# Altium PCB DSPpanel_v2.PcbDoc (part 1 of 2)
Units mil, origin at the board's own origin, x right, y up, seen from the top; angles counter-clockwise.
Board outline 3920 x 2100 mil, 2 copper layers (Top Layer, Bottom Layer); 189 components, 149 nets, 769 pads, 209 vias.
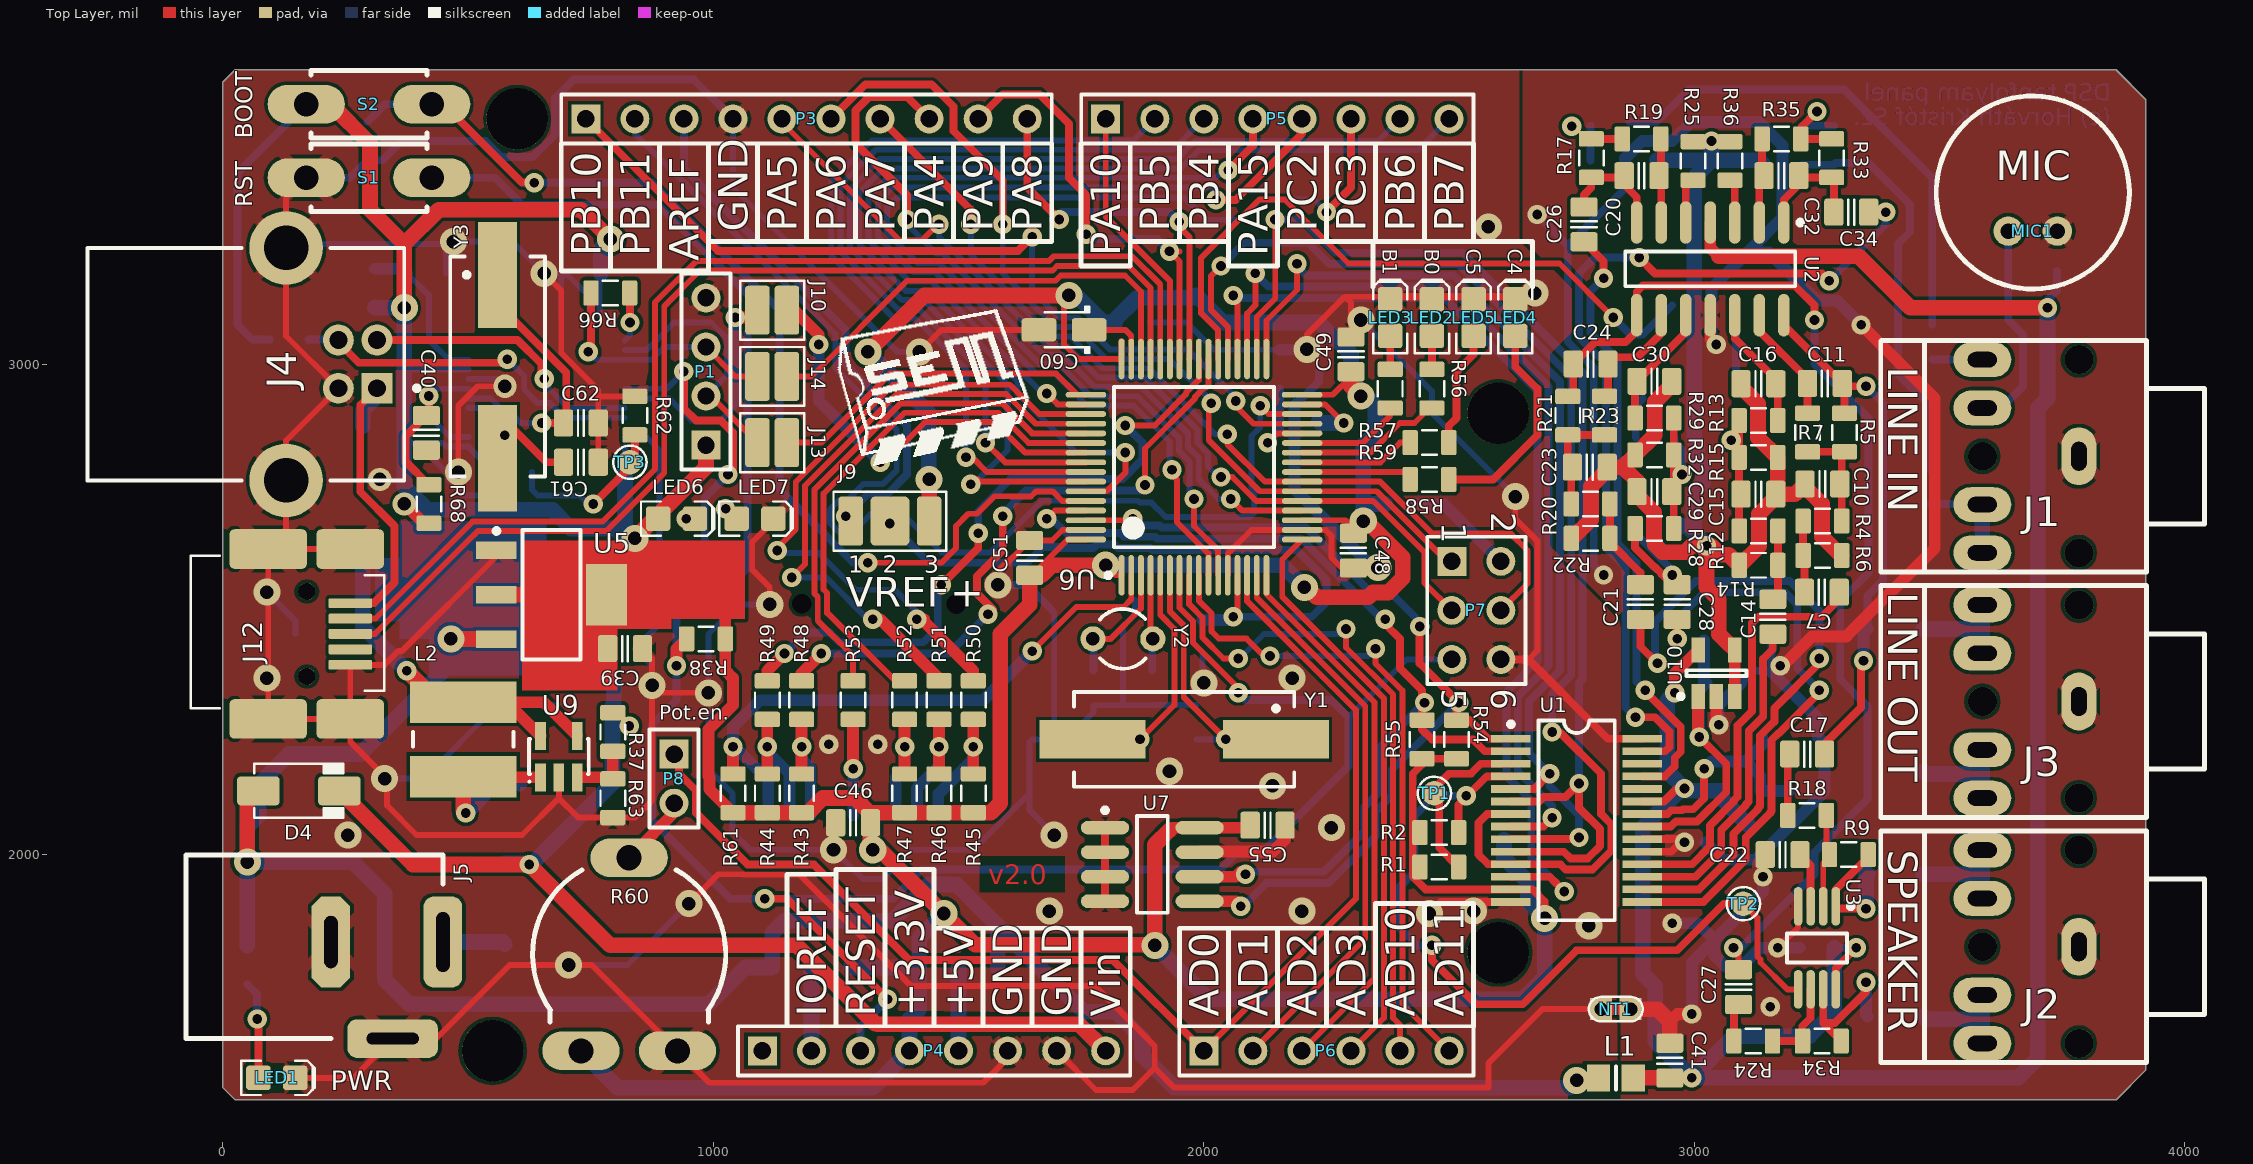
[diagram p0: Top Layer view]
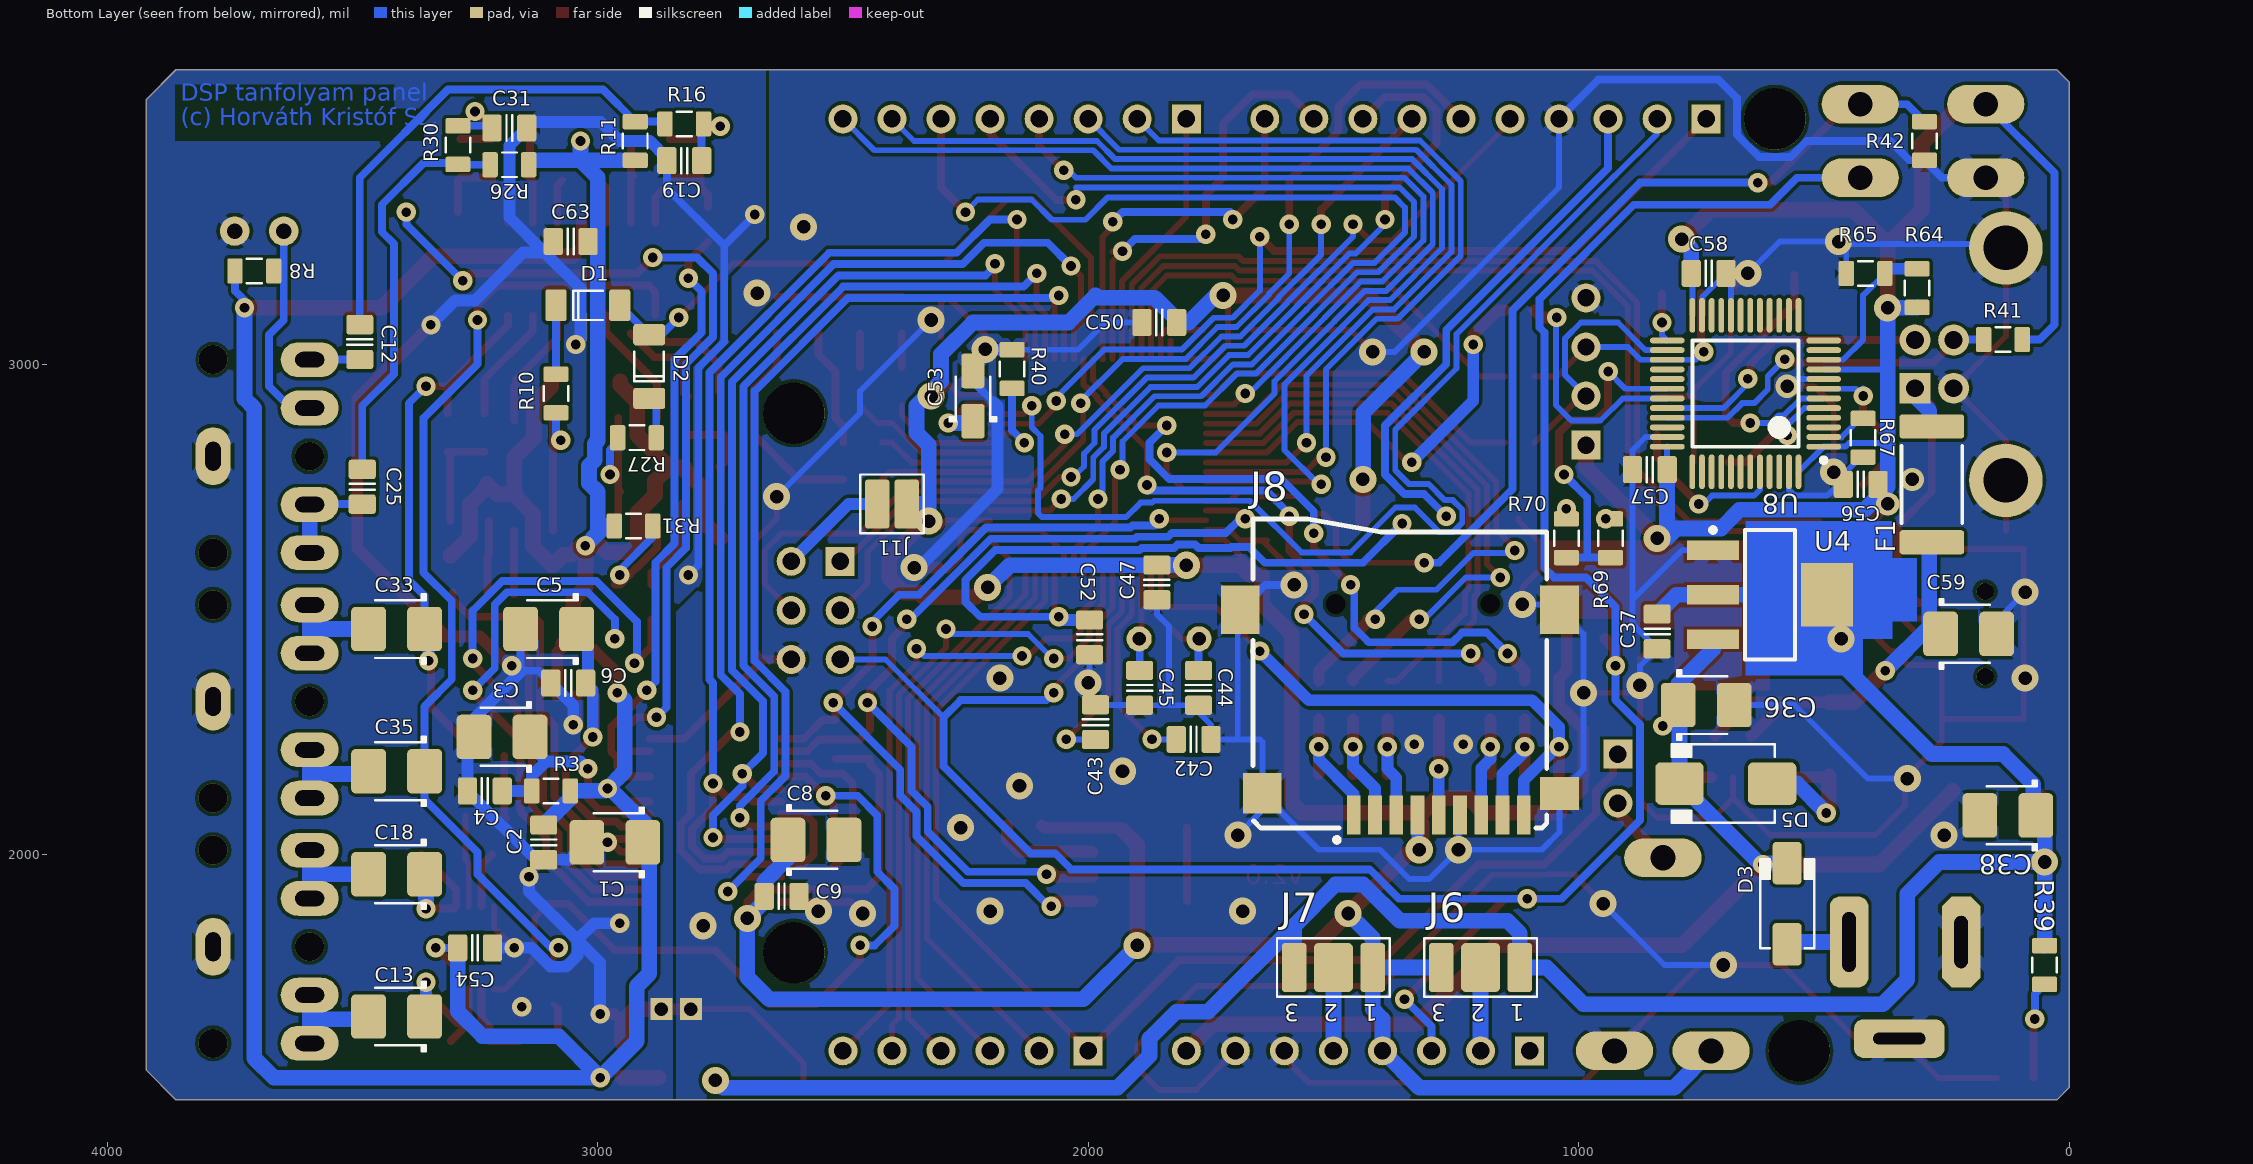
[diagram p1: Bottom Layer view, seen from below]
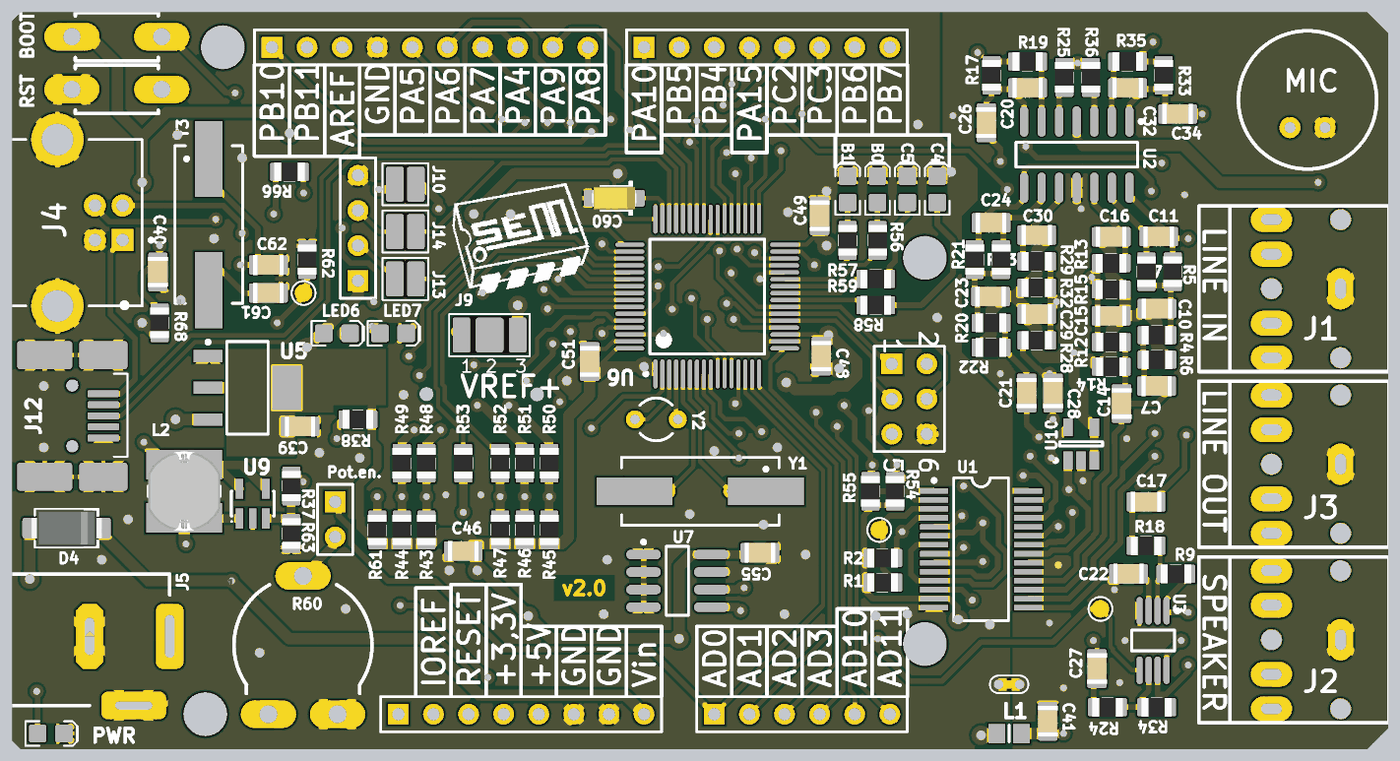
[diagram p3: 3D render of the assembled board from above, using the file's embedded part models]
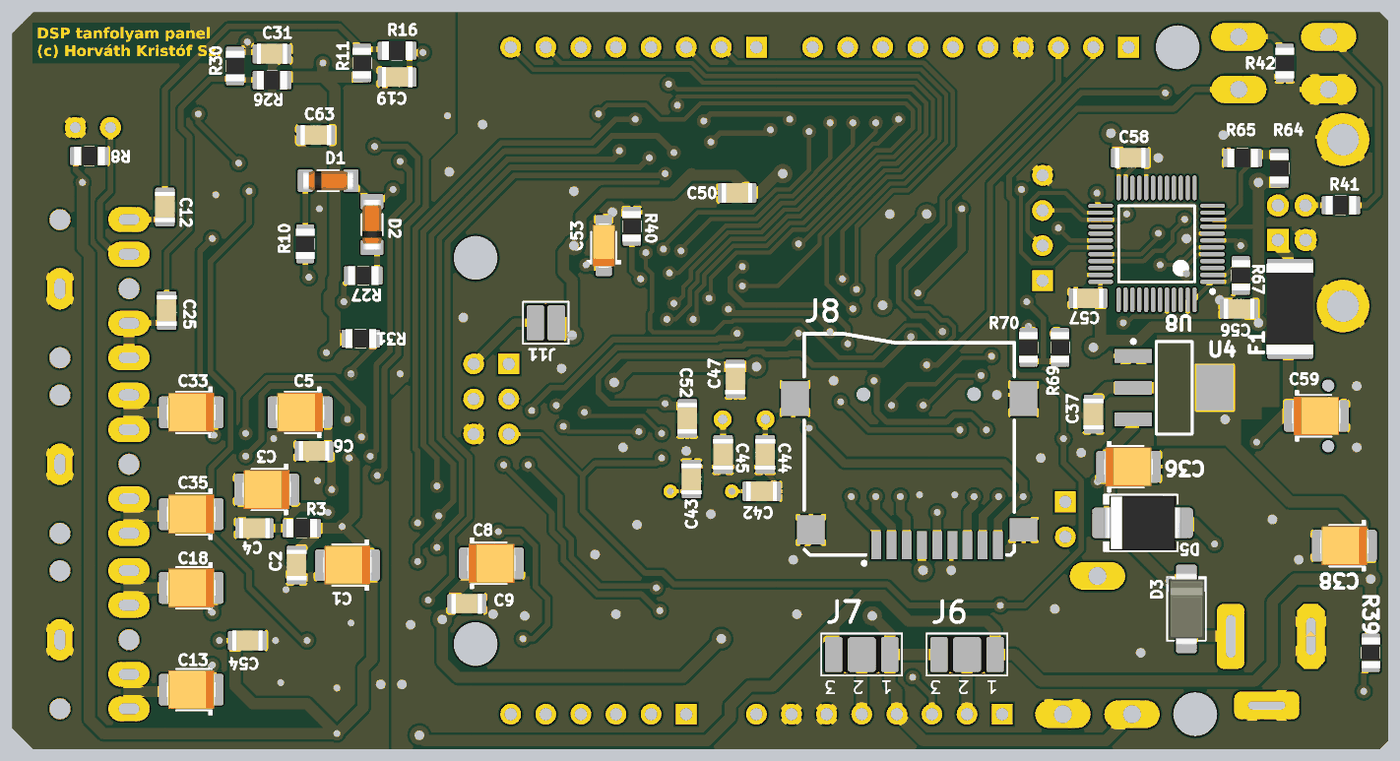
[diagram p4: 3D render of the assembled board from below, using the file's embedded part models]

## Layer stack, top to bottom
Top Layer: signal copper 1.4
Dielectric: core 12.6, FR-4, Dk 4.8
Bottom Layer: signal copper 1.4

## Board outline
25,1500 0,1525 0,3575 25,3600 3860,3600 3920,3540 3920,1560 3860,1500

## Design rules (kind name [scope] priority, off if disabled: settings)
Clearance [All] p1: gap=7
HoleSize [All] p1: absolutevalues=TRUE maxlimit=100 minlimit=27.56 maxpercent=80.000 minpercent=20.000
MinimumAnnularRing [All] p1: minimumring=7.87
MinimumSolderMaskSliver [All] p1 off: minsoldermaskwidth=10
PlaneClearance [All] p1: clearance=8
PolygonConnect "Net tie" [All vs HasFootprint('NetTie_External_24mil')] p1: connectstyle=Direct reliefconductorwidth=10 reliefentries=4 polygonreliefangle="90 Angle"
PolygonConnect Alkatreszek [(InComponentClass('All Components'))] p2: connectstyle=Relief reliefconductorwidth=20 reliefentries=4 polygonreliefangle="45 Angle"
PolygonConnect [All] p3: connectstyle=Direct reliefconductorwidth=10 reliefentries=4 polygonreliefangle="90 Angle"
RoutingVias [All] p1: holewidth=27.56 width=47.24 viastyle="Through Hole" minholewidth=19.68 minwidth=39.37 maxholewidth=39.37 maxwidth=59.06
SilkscreenOverComponentPads [All] p1: minsilkscreentomaskgap=10
SolderMaskExpansion [All] p1: expansion=4
Width [All] p1: maxlimit=32 minlimit=12 preferedwidth=16
24 further rules are at their usual default settings.

## Classes and differential pairs
component class stlink: C40 C56 C57 C58 C61 C62 LED6 LED7 P1 R41 R62 R64 R65 R66 R67 R68 R69 R70 TP3 U8 Y3
component class tapegyseg: C36 C37 C38 C39 C41 C59 D3 D4 D5 F1 J4 J5 L1 L2 LED1 NT1 R37 R38 R39 R63 U4 U5 U9
component class audioCodec: C1 C2 C3 C4 C5 C6 C7 C8 C9 C10 C11 C12 C13 C14 C15 C16 C17 C18 C19 C20 C21 C22 C23 C24 C25 C26 C27 C28 C29 C30 C31 C32 C33 C34 C35 C54 C63 D1 D2 J1 J2 J3 MIC1 R1 R2 R3 R4 R5 R6 R7 R8 R9 R10 R11 R12 R13 R14 R15 R16 R17 R18 R19 R20 R21 R22 R23 R24 R25 R26 R27 R28 R29 R30 R31 R32 R33 R34 R35 R36 TP1 TP2 U1 U2 U3 U10
component class DSPpanel_v2: C42 C43 C44 C45 C46 C47 C48 C49 C50 C51 C52 C53 C55 C60 J6 J7 J8 J9 J10 J11 J12 J13 J14 LED2 LED3 LED4 LED5 P3 P4 P5 P6 P7 P8 R40 R42 R43 R44 R45 R46 R47 R48 R49 R50 R51 R52 R53 R54 R55 R56 R57 R58 R59 R60 R61 S1 S2 U6 U7 Y1 Y2

## Components (designator, comment, footprint, x,y, rotation, side; value= is the part's Value field where it differs from the comment)
C1 "Cap Pol2" CAPMP3528X210N 2965,2025 r0 bottom
C2 "Cap" CAPC2012X135N 3110,2025 r270 bottom
C3 "Cap Pol2" CAPMP3528X210N 3195,2240 r0 bottom
C4 "Cap" CAPC2012X135N 3230,2130 r0 bottom
C5 "Cap Pol2" CAPMP3528X210N 3100,2460 r0 bottom
C6 "Cap" CAPC2012X135N 3060,2350 r0 bottom
C7 "Cap" CAPC2012X135N 3260,2535 r0 top
C8 "Cap Pol2" CAPMP3528X210N 2555,2030 r180 bottom
C9 "Cap" CAPC2012X135N 2625,1915 r180 bottom
C10 "Cap" CAPC2012X135N 3261.06,2755.63 r180 top
C11 "Cap" CAPC2012X135N 3266.06,2960.63 r0 top
C12 "Cap" CAPC2012X135N 3485,3045 r90 bottom
C13 "Cap Pol2" CAPMP3528X210N 3410,1670 r0 bottom
C14 "Cap" CAPC2012X135N 3160,2485 r270 top
C15 "Cap" CAPC2012X135N 3130.63,2735 r0 top
C16 "Cap" CAPC2012X135N 3130.63,2960 r180 top
C17 "Cap" CAPC2012X135N 3230,2205 r180 top
C18 "Cap Pol2" CAPMP3528X210N 3410,1960 r0 bottom
C19 "Cap" CAPC2012X135N 2823.46,3415 r0 bottom
C20 "Cap" CAPC2012X135N 2892.48,3384.21 r0 top
C21 "Cap" CAPC2012X135N 2890,2515 r270 top
C22 "Cap" CAPC2012X135N 3180,2000 r180 top
C23 "Cap" CAPC2012X135N 2786.97,2790 r0 top
C24 "Cap" CAPC2012X135N 2788.54,3000 r180 top
C25 "Cap" CAPC2012X135N 3480,2750 r90 bottom
C26 "Cap" CAPC2012X135N 2775,3285 r90 top
C27 "Cap" CAPC2012X135N 3090,1730 r90 top
C28 "Cap" CAPC2012X135N 2965,2515 r270 top
C29 "Cap" CAPC2012X135N 2918.54,2740 r180 top
C30 "Cap" CAPC2012X135N 2918.54,2965 r0 top
C31 "Cap" CAPC2012X135N 3180,3481.54 r180 bottom
C32 "Cap" CAPC2012X135N 3177.48,3384.21 r180 top
C33 "Cap Pol2" CAPMP3528X210N 3410,2460 r0 bottom
C34 "Cap" CAPC2012X135N 3320,3310 r180 top
C35 "Cap Pol2" CAPMP3528X210N 3410,2170 r0 bottom
C36 "Cap Pol2" CAPMP3528X210N 740,2305 r180 bottom
C37 "Cap" CAPC2012X135N 840,2455 r90 bottom
C38 "Cap Pol2" CAPMP3528X210N 125,2080 r0 bottom
C39 "Cap" CAPC2012X135N 820,2420 r180 top
C40 "Cap" CAPC2012X135N 415,2860 r90 top
C41 "Cap" CAPC2012X135N 2950,1580 r270 top
C42 "Cap" CAPC2012X135N 1785,2235 r180 bottom
C43 "Cap" CAPC2012X135N 1985,2270 r90 bottom
C44 "Cap" CAPC2012X135N 1775,2340 r90 bottom
C45 "Cap" CAPC2012X135N 1895,2340 r90 bottom
C46 "Cap" CAPC2012X135N 1285,2065 r0 top
C47 "Cap" CAPC2012X135N 1860,2555 r90 bottom
C48 "Cap" CAPC2012X135N 2305,2620 r90 top
C49 "Cap" CAPC2012X135N 2300,3020 r270 top
C50 "Cap" CAPC2012X135N 1855,3085 r180 bottom
C51 "Cap" CAPC2012X135N 1645,2605 r270 top
C52 "Cap" CAPC2012X135N 1997,2443 r90 bottom
C53 "4µ7" CAPMP3216X180N 2235,2935 r90 bottom
C54 "Cap" CAPC2012X135N 3250,1810 r180 bottom
C55 "Cap" CAPC2012X135N 2130,2060 r180 top
C56 "Cap" CAPC2012X135N 425,2755 r180 bottom
C57 "Cap" CAPC2012X135N 855,2785 r180 bottom
C58 "Cap" CAPC2012X135N 735,3185 r0 bottom
C59 "Cap Pol2" CAPMP3528X210N 205,2450 r180 bottom
C60 "4µ7" CAPMP3216X180N 1715,3070 r180 top
C61 "Cap" CAPC2012X135N 730,2800 r0 top
C62 "Cap" CAPC2012X135N 730,2880 r180 top
C63 "Cap" CAPC2012X135N 3055,3250 r0 bottom
D1 "Mini MELF" "SOD80, LL-34" 3020,3120 r180 bottom
D2 "Mini MELF" "SOD80, LL-34" 2895,2995 r90 bottom
D3 "100V; 1.5A" DO-214AC 575,1900 r90 bottom
D4 "100V; 1.5A" DO-214AC 155,2130 r0 top
D5 "SS34" DO-214AA 700,2145 r0 bottom
F1 "200 mA multifuse" RESC6332X70N 280,2755 r270 bottom
J1 "LINE IN" "STEREO JACK 3.5 mm" 4040,2950 r270 top locked
J2 "SPEAKER" "STEREO JACK 3.5 mm" 4040,1950 r270 top locked
J3 "LINE OUT" "STEREO JACK 3.5 mm" 4040,2450 r270 top locked
J4 "USB B female" 1437106 275,3000 r180 top locked
J5 "DC-JACK" JACK -75,1625 r90 top locked
J6 "IOREF" Jump_3Way#1 1200,1770 r0 bottom
J7 "Board 5/3.3V" Jump_3Way#1 1500,1770 r0 bottom
J8 "MicroSD Slot" "MICROSD Slot" 1205,2075 r270 bottom locked
J9 "VREF+" Jump_3Way#2 1360,2680 r0 top
J10 "Jumper" JUMP1#1 1120,3110 r0 top
J11 "Jumper" JUMP1#2 2400,2715 r0 bottom
J12 "USB Mini-B" USB_Mini-B_Molex_SMT -65,2255 r0 top locked
J13 "Jumper" JUMP1#1 1120,2840 r180 top
J14 "Jumper" JUMP1#1 1120,2975 r180 top
L1 "Inductor" 6-0805_N 2840,1545 r0 top
L2 "7447745100" WE-PD2-MS 490,2235 r270 top
LED1 "Red" LED-0805-K 110,1545 r0 top locked
LED2 "B0" LED-0805-K 2465,3095 r90 top
LED3 "B1" LED-0805-K 2380,3095 r90 top
LED4 "C4" LED-0805-K 2635,3095 r90 top
LED5 "C5" LED-0805-K 2550,3095 r90 top
LED6 "B0" LED-0805-K 925,2685 r0 top
LED7 "B0" LED-0805-K 1085,2685 r0 top
MIC1 "Electret microphone" "MIC 10 mm" 3690,3350 r270 top locked
NT1 "Net Tie" NetTie_External_24mil 2840,1685 r0 top net-tie
P1 "SWD" HDR1X4 985,2835 r90 top locked
P3 "DIGITAL0" HDR1X10 740,3500 r0 top locked
P4 "POWER" HDR1X8 1100,1600 r0 top locked
P5 "DIGITAL1" HDR1X8 1800,3500 r0 top locked
P6 "ANALOG" HDR1X6 2000,1600 r0 top locked
P7 "Header 3X2" HDR2X3 2505.51,2598.03 r270 top locked
P8 "Pot.en." HDR1X2 920,2205 r270 top
R1 "Opcionális" RESC2012X70N 2480,1975 r0 top
R2 "Res2" RESC2012X70N 2480,2045 r0 top
R3 "Res2" RESC2012X70N 3095,2130 r0 bottom
R4 "Res2" RESC2012X70N 3261.06,2680 r180 top
R5 "Res2" RESC2012X70N 3306.06,2860.63 r270 top
R6 "Res2" RESC2012X70N 3261.06,2610 r180 top
R7 "Res2" RESC2012X70N 3231.06,2860.63 r270 top
R8 "Res2" RESC2012X70N 3700,3190 r0 bottom
R9 "Res2" RESC2012X70N 3315,2000 r180 top
R10 "Res2" RESC2012X70N 3085,2940 r90 bottom
R11 "Res2" RESC2012X70N 2923.46,3455 r270 bottom
R12 "Res2" RESC2012X70N 3131.06,2660 r0 top
R13 "Res2" RESC2012X70N 3130.63,2885 r180 top
R14 "Res2" RESC2012X70N 3131.06,2590 r0 top
R15 "Res2" RESC2012X70N 3130.63,2810 r0 top
R16 "Res2" RESC2012X70N 2823.46,3490 r180 bottom
R17 "Res2" RESC2012X70N 2790,3420 r90 top
R18 "Res2" RESC2012X70N 3230,2080 r180 top
R19 "Res2" RESC2012X70N 2892.48,3459.21 r180 top
R20 "Res2" RESC2012X70N 2788.54,2715 r0 top
R21 "Res2" RESC2012X70N 2741.97,2895 r270 top
R22 "Res2" RESC2012X70N 2788.54,2645 r0 top
R23 "Res2" RESC2012X70N 2816.97,2895 r270 top
R24 "Res2" RESC2012X70N 3120,1620 r180 top
R25 "Res2" RESC2012X70N 2997.48,3414.21 r90 top
R26 "Res2" RESC2012X70N 3180,3406.54 r180 bottom
R27 "Res2" RESC2012X70N 2920,2850 r0 bottom
R28 "Res2" RESC2012X70N 2918.54,2665 r180 top
R29 "Res2" RESC2012X70N 2918.54,2890 r0 top
R30 "Res2" RESC2012X70N 3285,3446.54 r90 bottom
R31 "Res2" RESC2012X70N 2926.97,2670 r180 bottom
R32 "Res2" RESC2012X70N 2918.54,2815 r180 top
R33 "Res2" RESC2012X70N 3280,3420 r90 top
R34 "Res2" RESC2012X70N 3260,1620 r180 top
R35 "Res2" RESC2012X70N 3177.48,3459.21 r0 top
R36 "Res2" RESC2012X70N 3072.48,3414.21 r90 top
R37 "Res2" RESC2012X70N 795,2250 r90 top
R38 "Res2" RESC2012X70N 985,2440 r180 top
R39 "Res2" RESC2012X70N 50,1775 r90 bottom
R40 "Res2" RESC2012X70N 2155,2990 r270 bottom
R41 "Res2" RESC2012X70N 135,3050 r180 bottom
R42 "Res2" RESC2012X70N 295,3455 r90 bottom
R43 "Res2" RESC2012X70N 1180,2125 r270 top
R44 "Res2" RESC2012X70N 1110,2125 r270 top
R45 "Res2" RESC2012X70N 1530,2125 r270 top
R46 "Res2" RESC2012X70N 1460,2125 r270 top
R47 "Res2" RESC2012X70N 1390,2125 r270 top
R48 "Res2" RESC2012X70N 1180,2315 r90 top
R49 "Res2" RESC2012X70N 1110,2315 r90 top
R50 "Res2" RESC2012X70N 1530,2315 r90 top
R51 "Res2" RESC2012X70N 1460,2315 r90 top
R52 "Res2" RESC2012X70N 1390,2315 r90 top
R53 "Res2" RESC2012X70N 1285,2315 r90 top
R54 "Res2" RESC2012X70N 2515,2235 r270 top
R55 "Res2" RESC2012X70N 2445,2235 r270 top
R56 "Res2" RESC2012X70N 2465,2950 r270 top
R57 "Res2" RESC2012X70N 2380,2950 r270 top
R58 "Res2" RESC2012X70N 2460,2765 r180 top
R59 "Res2" RESC2012X70N 2460,2840 r180 top
R60 "25 turns" PT-105 730,1600 r0 top
R61 "Res2" RESC2012X70N 1040,2125 r270 top
R62 "Res2" RESC2012X70N 840,2895 r270 top
R63 "Res2" RESC2012X70N 795,2115 r90 top
R64 "Res2" RESC2012X70N 310,3155 r270 bottom
R65 "Res2" RESC2012X70N 415,3185 r180 bottom
R66 "Res2" RESC2012X70N 790,3145 r0 top
R67 "Res2" RESC2012X70N 420,2850 r270 bottom
R68 "Res2" RESC2012X70N 420,2715 r90 top
R69 "Res2" RESC2012X70N 935,2645 r90 bottom
R70 "Res2" RESC2012X70N 1025,2645 r270 bottom
S1 "RESET" TACT6x3 170,3380 r0 top locked
S2 "BOOT" TACT6x3 170,3530 r0 top locked
TP1 "TESTPOINT" TP-R60 2470,2125 r0 top
TP2 "TESTPOINT" TP-R60 3100,1900 r90 top
TP3 "TESTPOINT" TP-R60 830,2800 r90 top
U1 "WM8591" SSOP-28 2760,2070 r270 top locked
U2 "MCP6004-I/SL" SOIC-SL14_N 3032.48,3194.21 r270 top
U3 "TS486" MSOP-MS8_M 3250,1810 r270 top
U4 "LD1117S50CTR" SOT-223_M 610,2530 r180 bottom
U5 "LD1117S33CTR" SOT-223_L 670,2530 r0 top
U6 "STM32F405RGT6" STM-LQFP64_M 1980,2790 r90 top locked
U7 "24LC024H-E/SN" SOIC-SN8_M 1895,1980 r0 top
U8 "STM32F103C8T6" STM-LQFP48_N 660,2940 r0 bottom locked
U9 "MP1540DJ" S5 685,2200 r0 top
U10 "MCP6001UT-I/OT" SOT-23-OT5_M 3045,2370 r90 top
Y1 "HC49" HC49/4H_SMX 1960,2235 r180 top
Y2 "R38-32.768" R38 1835,2440 r270 top
Y3 "8 MHz" HC49/4H_SMX 560,2995 r270 top

## Footprints (in the part's own frame and the unit in brackets; to place one, negate y for a bottom-side part, rotate by r counter-clockwise, add the part's x,y. Pads: shape width x height; smd on the part's side, far side on the other; paste and mask are expansions set on the pad)
6-0805_N [mm] "Chip Resistor, Body 2.0x1.2mm, IPC Medium Density"
  rect 1.2x1.4 smd: 1(-0.9,0) 2(0.9,0)
  silkscreen extent 0,-0.6 0,0.6, body extent -1.07,-0.7 1.07,0.7, height 0.7
1437106 [mm] "Connector; USB1.1, Type B, Thru-Hole; 4 Position; Right Angle"
  rect 1.6x1.6 hole 0.92: 1(-1,1.25)
  round 1.6 hole 0.92: 2(-1,-1.25) 3(1,-1.25) 4(1,1.25)
  round 3.8 hole 2.3: 5(3.71,6.02) 6(3.71,-6.02)
  silkscreen extent -3.18,-6.02 13.99,6.02
CAPC2012X135N [mm] "Chip Capacitor, Body 2.0x1.2mm, EIA 0805, IPC Medium Density"
  round 0.254 on Mech15: 0(0,0)
  rrect25% 1x1.4 smd: 1(-0.9,0) 2(0.9,0)
  Top Layer pour cut-out: -0.675,0.7 -0.475,0.9 0.475,0.9 0.675,0.7 0.675,-0.7 0.475,-0.9 -0.475,-0.9 -0.675,-0.7
  silkscreen extent -0.15,-0.65 0.15,0.65, body extent -1.1,-0.72 1.1,0.73, height 1.34
CAPMP3216X180N [mm] "Capacitor, polarized, Molded Body, EIA 535BAAC size A; 3.20mm L X 1.60mm W X 1.80mm H"
  round 0.508 on Mech15: 0(0,0)
  rrect25% 1.8x1.2 smd: 1(-1.3,0) 2(1.3,0)
  silkscreen extent -1.3,-1.2 1,1.2, body extent -1.6,-0.8 1.6,0.8, height 1.8
CAPMP3528X210N [mm] "Molded body capacitor, Body 3.5x2.8mm, 1210, IPC Nominal settings"
  round 0.254 on Mech15: 0(0,0)
  rrect25% 1.8x2.3 smd: 1(-1.45,0) 2(1.45,0)
  Top Layer pour cut-out: -0.508,1.27 0.508,1.27 0.508,-1.27 -0.508,-1.27
  silkscreen extent -1.5,-1.8 1.1,1.8, body extent -1.75,-1.4 1.75,1.4, height 2.1
DO-214AA [mm] "JEDEC DO214 variation AA. SMB"
  round 0.508 on Mech15: 0(0,0)
  rrect25% 2.5x2.2 smd: A(-2.4,0) K(2.4,0)
  silkscreen extent -2.54,-2.03 2.79,2.03, body extent -2.8,-1.97 2.8,1.98, height 2.62
DO-214AC [mm] "JEDEC DO214 variation AC. SMA"
  round 0.508 on Mech15: 0(0,0)
  rrect25% 2.2x1.5 smd: A(-2.1,0) K(2.1,0)
  silkscreen extent -2.3,-1.4 2.3,1.4, body extent -2.6,-1.3 2.6,1.3, height 2.42
HC49/4H_SMX [mm] "Surface Mount Quartz Crystal; Body 13.4 (inc. leads) x 4.9 mm (LxW max)"
  rect 5.5x2 smd: 1(-4.75,0) 2(4.75,0)
  silkscreen extent -5.7,-2.45 5.7,2.45
HDR1X2 [mm] "Connector; Header; 2 Position"
  rect 1.5x1.5 hole 0.9: 1(0,0)
  round 1.5 hole 0.9: 2(2.54,0)
  silkscreen extent -1.27,-1.27 3.81,1.27
HDR1X4 [mm] "Connector; Header; 4 Position"
  rect 1.5x1.5 hole 0.9: 1(0,0)
  round 1.5 hole 0.9: 2(2.54,0) 3(5.08,0) 4(7.62,0)
  silkscreen extent -1.27,-1.27 8.89,1.27
HDR1X6 [mm] "Connector; Header; 6 Position"
  rect 1.5x1.5 hole 0.9: 1(0,0)
  round 1.5 hole 0.9: 2(2.54,0) 3(5.08,0) 4(7.62,0) 5(10.16,0) 6(12.7,0)
  silkscreen extent -1.27,-1.27 13.97,1.27
HDR1X8 [mm] "Connector; Header; 8 Position"
  rect 1.5x1.5 hole 0.9: 1(0,0)
  round 1.5 hole 0.9: 2(2.54,0) 3(5.08,0) 4(7.62,0) 5(10.16,0) 6(12.7,0) 7(15.24,0) 8(17.78,0)
  silkscreen extent -1.27,-1.27 19.05,1.27
HDR1X10 [mm] "Connector; Header; 10 Position"
  rect 1.5x1.5 hole 0.9: 1(0,0)
  round 1.5 hole 0.9: 2(2.54,0) 3(5.08,0) 4(7.62,0) 5(10.16,0) 6(12.7,0) 7(15.24,0) 8(17.78,0) 9(20.32,0) 10(22.86,0)
  silkscreen extent -1.27,-1.27 24.13,1.27
HDR2X3 [mm] "Connector; Header; 3x2 Position"
  rect 1.5x1.5 hole 0.9: 1(0,0)
  round 1.5 hole 0.9: 2(0,2.54) 3(2.54,0) 4(2.54,2.54) 5(5.08,0) 6(5.08,2.54)
  silkscreen extent -1.27,-1.27 6.35,3.81
JACK [mm] "Jack tápcsatlakozó"
  oct 4.7x2 hole 0.7 slot 2.7 at 0 deg: 1(5,-7.5)
  rrect50% 2x4.7 hole 0.6 slot 2.7 at 90 deg: 2(0,-10.7)
  rrect50% 4.7x2 hole 0.7 slot 3.1 at 0 deg: 3(5,-13.3)
  silkscreen extent 0,-13.3 9.5,0
JUMP1#1 [mil] "SMT Battery jumper pads"
  rrect25% 50x100 smd: 1(-30,0) 2(30,0)
  rrect25% 118x108 on Top Solder: SM(0,0)
  silkscreen extent -65,-60 65,60
JUMP1#2 [mil] "SMT Battery jumper pads"
  rrect25% 50x100 smd: 1(-30,0) 2(30,0)
  rrect25% 118x108 on Bottom Solder: SM(0,0)
  silkscreen extent -65,-60 65,60
Jump_3Way#1 [mil] "SMT Battery jumper pads"
  rrect25% 50x100 smd: 1(-80,0) 3(80,0)
  rrect25% 80x100 smd: 2(0,0)
  rrect25% 218x108 on Bottom Solder: SM(0,0)
  silkscreen extent -115,-60 115,60
Jump_3Way#2 [mil] "SMT Battery jumper pads"
  rrect25% 50x100 smd: 1(-80,0) 3(80,0)
  rrect25% 80x100 smd: 2(0,0)
  rrect25% 218x108 on Top Solder: SM(0,0)
  silkscreen extent -115,-60 115,60
LED-0805-K [mil]
  round 20 on Mech15: 0(0,0)
  rrect25% 50x50 smd: A(-37.5,0) K(37.5,0)
  Top Layer pour cut-out: -15,30 15,30 15,-30 -15,-30
  silkscreen extent -72,-35 77,35, body extent -39,-25 39,25, height 31
"MIC 10 mm" [mil] "10 mm átmérõjû elektret mikrofon betét"
  round 60 hole 31.5: 1(78.74,-50) 2(78.74,50)
  silkscreen extent -197,-197 197,197
"MICROSD Slot" [mil] "MicroSD Card Socket"
  rect 80x28 smd: 1(-6,-253.47) 2(-6,-210.16) 3(-6,-166.85) 4(-6,-123.55) 5(-6,-80.24) 6(-6,-36.93) 7(-6,6.38) 8(-6,49.68) 9(-6,92.99)
  rect 98.43x78.74 smd: 10(-424.01,-485) 13(-424.01,166)
  rect 83x78.74 smd: 11(-50,-439.8)
  rect 67x78.74 smd: 12(-50,166)
  round 23.62 hole 40 unplated: MH1(-436.89,25) MH2(-436,-289.96)
  silkscreen extent -609,-459 50,140, body extent -611,-460 21,140, height 67
MSOP-MS8_M [mm] "TSOP, 8-Leads, Body 3x3mm, Pitch 0.65mm, IPC Low Density"
  oval 2x0.45 smd: 1(-2.15,0.975) 2(-2.15,0.325) 3(-2.15,-0.325) 4(-2.15,-0.975) 5(2.15,-0.975) 6(2.15,-0.325) 7(2.15,0.325) 8(2.15,0.975)
  silkscreen extent -2.27,-1.55 0.75,1.88, body extent -1.6,-1.6 1.6,1.6, height 1.1
NetTie_External_24mil [mil]
  rect 45x45 hole 27.56: 1(-30,0) 2(30,0)
  Top Layer lines w24: -30,0 30,0
  silkscreen extent -55,-25 55,25
PT-105 [mm] "Furatszerelt, fektetett trimmer potenciométer"
  oval 4x2 hole 1.3: 1(0,0) 2(2.5,10) 3(5,0)
  silkscreen extent -2.5,1.5 7.5,9.37
R38 [mm] "Crystal, Thru-Hole; 2 Leads; Body 3.1 x 8.2 mm (Dia.xH)"
  round 1.3 hole 0.7: 1(0,1.55) 2(0,-1.55)
  silkscreen extent -1.55,-1.19 1.55,1.17
RESC2012X70N [mm] "Chip Resistor, Body 2.0x1.2mm, EIA 0805, IPC Medium Density"
  round 0.254 on Mech15: 0(0,0)
  rrect25% 0.8x1.3 smd: 1(-1,0) 2(1,0)
  Top Layer pour cut-out: -0.725,0.65 -0.525,0.85 0.525,0.85 0.725,0.65 0.725,-0.65 0.525,-0.85 -0.525,-0.85 -0.725,-0.65
  silkscreen extent -0.38,-0.64 0.38,0.64, body extent -1.1,-0.67 1.1,0.68, height 0.69
RESC6332X70N [mm] "Chip Resistor, Body 6.3x3.2mm, 2512, IPC Medium Density"
  round 1 on Mech15: 0(0,0)
  rrect25% 1.25x3.35 smd: 1(-3,0) 2(3,0)
  silkscreen extent -2,-1.58 2,1.58, body extent -3.3,-1.7 3.3,1.7, height 0.69
S5 [mm] "SOT-23/SC-74A; 5 Leads; Body 3.1 x 3 mm, inc. leads (LxW max)"
  rect 0.55x1.45 smd: 1(-0.95,-1.075) 2(0,-1.075) 3(0.95,-1.075) 4(0.95,1.075) 5(-0.95,1.075)
  silkscreen extent -1.57,-1.35 1.55,0.9
"SOD80, LL-34" [mm] "Diode, MiniMELF"
  round 0.5 on Mech15: 0(0,0)
  rrect25% 1.1x1.65 smd: A(1.65,0) K(-1.65,0)
  silkscreen extent -0.76,-0.76 0.76,0.76, body extent -1.8,-0.75 1.8,0.75, height 1.47
SOIC-SL14_N [mm] "SOIC, 14-Leads, Body 8.7x3.9mm, Pitch 1.27mm, IPC Medium Density"
  oval 2.2x0.6 smd: 1(-2.4,3.81) 2(-2.4,2.54) 3(-2.4,1.27) 4(-2.4,0) 5(-2.4,-1.27) 6(-2.4,-2.54) 7(-2.4,-3.81) 8(2.4,-3.81) 9(2.4,-2.54) 10(2.4,-1.27) 11(2.4,0) 12(2.4,1.27) 13(2.4,2.54) 14(2.4,3.81)
  silkscreen extent -2.52,-4.4 0.9,4.79, body extent -2,-4.38 2,4.38, height 1.75
SOIC-SN8_M [mm] "SOIC, 8-Leads, Body 4.9x3.8mm, Pitch 1.27mm, IPC Low Density"
  oval 2.5x0.7 smd: 1(-2.45,1.905) 2(-2.45,0.635) 3(-2.45,-0.635) 4(-2.45,-1.905) 5(2.45,-1.905) 6(2.45,-0.635) 7(2.45,0.635) 8(2.45,1.905)
  silkscreen extent -2.57,-2.5 0.8,2.93, body extent -2,-2.5 2,2.5, height 1.75
SOT-23-OT5_M [mm] "SOT23, 5-Leads, Body 2.9x1.6mm, Pitch 0.95mm, Lead Span 2.7mm, IPC Low Density"
  rect 1.3x0.7 smd: 1(-1.2,0.95) 2(-1.2,0) 3(-1.2,-0.95) 4(1.2,-0.95) 5(1.2,0.95)
  silkscreen extent -1.32,-1.55 0.15,1.97, body extent -0.9,-1.55 0.9,1.55, height 1.45
SOT-223_L [mm] "SOT223, 4-Leads, Body 6.5x3.5mm, Pitch 2.3mm, Lead Span 7mm, IPC High Density"
  rect 2.1x0.9 smd: 1(-2.85,2.3) 2(-2.85,0) 3(-2.85,-2.3)
  rect 2.1x3.2 smd: 4(2.85,0)
  silkscreen extent -2.97,-3.35 1.5,3.42, body extent -1.85,-3.35 1.85,3.35, height 1.8
SOT-223_M [mm] "SOT223, 4-Leads, Body 6.5x3.5mm, Pitch 2.3mm, Lead Span 7mm, IPC Low Density"
  rect 2.7x1 smd: 1(-2.95,2.3) 2(-2.95,0) 3(-2.95,-2.3)
  rect 2.7x3.3 smd: 4(2.95,0)
  silkscreen extent -3.08,-3.35 1.3,3.47, body extent -1.85,-3.35 1.85,3.35, height 1.8
SSOP-28 [mm] "SSOP, Plastic; 28 Leads; Body Width 5.2 mm; Pitch 0.65 mm"
  rect 0.4x2.05 smd: 1(-4.225,-3.4) 2(-3.575,-3.4) 3(-2.925,-3.4) 4(-2.275,-3.4) 5(-1.625,-3.4) 6(-0.975,-3.4) 7(-0.325,-3.4) 8(0.325,-3.4) 9(0.975,-3.4) 10(1.625,-3.4) 11(2.275,-3.4) 12(2.925,-3.4) 13(3.575,-3.4) 14(4.225,-3.4) 15(4.225,3.4) 16(3.575,3.4) 17(2.925,3.4) 18(2.275,3.4) 19(1.625,3.4) 20(0.975,3.4) 21(0.325,3.4) 22(-0.325,3.4) 23(-0.975,3.4) 24(-1.625,3.4) 25(-2.275,3.4) 26(-2.925,3.4) 27(-3.575,3.4) 28(-4.225,3.4)
  silkscreen extent -5.18,-3.52 5.17,1.98
"STEREO JACK 3.5 mm" [mm]
  oval 3x1.8 hole 0.8 slot 1.5 at 0 deg: 1(3.5,-6.5)
  oval 1.8x3 hole 0.8 slot 1.5 at 90 deg: 2(-1.5,-11.5) 3(8.5,-11.5) 4(1,-11.5) 5(6,-11.5)
  silkscreen extent -2.5,-14.5 9.5,0
STM-LQFP48_N [mm] "QFP, 48-Leads, Body 7x7mm, Pitch 0.5mm, IPC Medium Density"
  oval 1.8x0.3 smd: 1(-4.05,2.75) 2(-4.05,2.25) 3(-4.05,1.75) 4(-4.05,1.25) 5(-4.05,0.75) 6(-4.05,0.25) 7(-4.05,-0.25) 8(-4.05,-0.75) 9(-4.05,-1.25) 10(-4.05,-1.75) 11(-4.05,-2.25) 12(-4.05,-2.75) 25(4.05,-2.75) 26(4.05,-2.25) 27(4.05,-1.75) 28(4.05,-1.25) 29(4.05,-0.75) 30(4.05,-0.25) 31(4.05,0.25) 32(4.05,0.75) 33(4.05,1.25) 34(4.05,1.75) 35(4.05,2.25) 36(4.05,2.75)
  oval 0.3x1.8 smd: 13(-2.75,-4.05) 14(-2.25,-4.05) 15(-1.75,-4.05) 16(-1.25,-4.05) 17(-0.75,-4.05) 18(-0.25,-4.05) 19(0.25,-4.05) 20(0.75,-4.05) 21(1.25,-4.05) 22(1.75,-4.05) 23(2.25,-4.05) 24(2.75,-4.05) 37(2.75,4.05) 38(2.25,4.05) 39(1.75,4.05) 40(1.25,4.05) 41(0.75,4.05) 42(0.25,4.05) 43(-0.25,4.05) 44(-0.75,4.05) 45(-1.25,4.05) 46(-1.75,4.05) 47(-2.25,4.05) 48(-2.75,4.05)
  silkscreen extent -4.17,-2.75 2.75,3.57, body extent -3.5,-3.5 3.5,3.5, height 1.6
STM-LQFP64_M [mm] "Thin QFP, 64-Leads, Body 10x10mm, Pitch 0.5mm, IPC Low Density"
  oval 2.1x0.3 smd: 1(-5.6,3.75) 2(-5.6,3.25) 3(-5.6,2.75) 4(-5.6,2.25) 5(-5.6,1.75) 6(-5.6,1.25) 7(-5.6,0.75) 8(-5.6,0.25) 9(-5.6,-0.25) 10(-5.6,-0.75) 11(-5.6,-1.25) 12(-5.6,-1.75) 13(-5.6,-2.25) 14(-5.6,-2.75) 15(-5.6,-3.25) 16(-5.6,-3.75) 33(5.6,-3.75) 34(5.6,-3.25) 35(5.6,-2.75) 36(5.6,-2.25) 37(5.6,-1.75) 38(5.6,-1.25) 39(5.6,-0.75) 40(5.6,-0.25) 41(5.6,0.25) 42(5.6,0.75) 43(5.6,1.25) 44(5.6,1.75) 45(5.6,2.25) 46(5.6,2.75) 47(5.6,3.25) 48(5.6,3.75)
  oval 0.3x2.1 smd: 17(-3.75,-5.6) 18(-3.25,-5.6) 19(-2.75,-5.6) 20(-2.25,-5.6) 21(-1.75,-5.6) 22(-1.25,-5.6) 23(-0.75,-5.6) 24(-0.25,-5.6) 25(0.25,-5.6) 26(0.75,-5.6) 27(1.25,-5.6) 28(1.75,-5.6) 29(2.25,-5.6) 30(2.75,-5.6) 31(3.25,-5.6) 32(3.75,-5.6) 49(3.75,5.6) 50(3.25,5.6) 51(2.75,5.6) 52(2.25,5.6) 53(1.75,5.6) 54(1.25,5.6) 55(0.75,5.6) 56(0.25,5.6) 57(-0.25,5.6) 58(-0.75,5.6) 59(-1.25,5.6) 60(-1.75,5.6) 61(-2.25,5.6) 62(-2.75,5.6) 63(-3.25,5.6) 64(-3.75,5.6)
  silkscreen extent -5.72,-4.15 4.15,4.57, body extent -5,-5 5,5, height 1.6
TACT6x3 [mm] "Kapcsoló"
  oval 4x2 hole 1.25: 1(6.5,0) 2(0,0)
  silkscreen extent 0.25,-1.75 6.25,1.75
TP-R60 [mil]
  round 50 smd paste-50: 1(0,0)
  silkscreen extent -34,-34 34,34, body extent -30,-30 30,30, height 10
USB_Mini-B_Molex_SMT [mm]
  rrect25% 2.25x0.5 smd: 1(8.25,6.55) 2(8.25,5.75) 3(8.25,4.95) 4(8.25,4.15) 5(8.25,3.35)
  round 0.9 hole 0.9 unplated: H1(6,7.15) H2(6,2.75)
  rrect25% 4x2.05 smd: MH1(4,0.55) MH4(4,9.35)
  rrect25% 3.5x2.05 smd: MH2(8.25,0.55) MH3(8.25,9.35)
  silkscreen extent 0,1.1 10,9, body extent 0,1.1 9,9, height 3.95
WE-PD2-MS [mm] "SMD Inductor, 2-Leads, Body 5.8 x 5.2 mm"
  rect 2.15x5.5 smd: 1(-1.925,0) 2(1.925,0)
  silkscreen extent -0.38,-2.6 0.38,2.6, body extent -2.9,-2.6 2.9,2.6, height 2.3

## Part data
C1 C3 C5 C8 C13 C18 C33 C35 C36 C38 C59: "Polarized Capacitor (Axial)"
C2 C4 C6 C7 C9 C10 C11 C12 C14 C15 C16 C17 C19 C20 C21 C22 C23 C24 C25 C26 C27 C28 C29 C30 C31 C32 C34 C37 C39 C40 C41 C42 C43 C44 C45 C46 C47 C48 C49 C50 C51 C52 C54 C55 C56 C57 C58 C61 C62 C63: "Capacitor"
C53 C60: library part CAPT_4u7_3216_16V, "Capacitor SMD Tantalum 4.7uF 10% 16V 3216-18"
D1 D2: library part DIODE_100V_500mW_MELF, "Diode SMD 100V 150mA 500mW SOD80"
D3 D4: library part DIODE_100V_1.5A_SMA, "Diode SMD 100V 1.5A SMA"
D5: library part DIODE_SCHOTTKY_MBRS130L, "Diode Schottky SMD 30V 2A DO-214AA"
F1: library part "Fuse 1", "Fuse"
J1 J2 J3: library part "STEREO JACK", "Sztereo audio csatlakozó 3,5 mm"
J4: library part 4-1437106-8, "USB 1.1, Right Angle, Thru-Hole, B Type, Receptacle, 4 Position, Natural"
J5: "Tápcsatlakozó"
J6 J7 J9: library part JUMP_3WAY, "SMD jumper"
J10 J11 J13 J14: library part JUMP1, "SMD jumper"
J12: library part USB_Mini-B, "Connector SMD USB Type Mini-B"
L2: "SMD Power Inductor WE-PD2, L = 10.0 µH"
LED1 LED2 LED3 LED4 LED5 LED6 LED7: library part LED_SMD_Red_0805_6mcd, "LED 0805 SMD Red 6mcd 621nm"
MIC1: "Elektret mikrofon kapszula"
NT1: library part JUMP_NETTIE
P1: library part "Header 4", "Header, 4-Pin"
P3: library part "Header 10", "Header, 10-Pin"
P4 P5: library part "Header 8", "Header, 8-Pin"
P6: library part "Header 6", "Header, 6-Pin"
P7: "Header, 3-Pin, Dual row"
P8: library part "Header 2", "Header, 2-Pin"
R1: library part Res2, "Resistor"
R2 R3 R4 R5 R6 R7 R8 R9 R10 R11 R12 R13 R14 R15 R16 R17 R18 R19 R20 R21 R22 R23 R24 R25 R26 R27 R28 R29 R30 R31 R32 R33 R34 R35 R36 R37 R38 R39 R40 R41 R42 R43 R44 R45 R46 R47 R48 R49 R50 R51 R52 R53 R54 R55 R56 R57 R58 R59 R61 R62 R63 R64 R65 R66 R67 R68 R69 R70: "Resistor"
R60: library part POT, "Trimmer THD"
S1 S2: library part SW_THT_PB_5.0mm, "Switch, tact, 5.0mm stem"
TP1 TP2 TP3: "SMD test pin"
U1: "WM8591 AUDIO CODEC"
U2: "1 MHz, Low-Power Operational Amplifier, 14-Pin SOIC, Industrial Temperature"
U3: "0.1 W audio amplifier"
U4: "Fixed Low Drop Positive Voltage Regulator, 5V, 4-Pin SOT-223, Tape and Reel"
U5: "Fixed Low Drop Positive Voltage Regulator, 3.3V, 4-Pin SOT-223, Tape and Reel"
U6: "ARM Cortex-M4 32-bit MCU+FPU, 210 DMIPS, 1024 kB Flash, 192 kB Internal RAM, 51 I/Os, 64-pin LQFP, -40 to 85 degC, Tray"
U7: "2Kbit, 1MHz, 2.5V, Addressable Serial EEPROM, 8-Pin SOIC 150mil, Extended Temperature"
U8: "ARM Cortex-M3 32-bit MCU, 64 KB Flash, 20 KB Internal RAM, 37 I/Os, 48-pin LQFP, -40 to 85 degC, Tray"
U9: library part MP1540, "Step-up converter"
U10: "1 MHz, Low-Power Operational Amplifier, 5-Pin SOT-23, Industrial Temperature, Tape and Reel"
Y1 Y3: library part HC49/4H_SMX, "Surface Mount Quartz Crystal"
Y2: "Tuning Fork Crystal Unit"

## Free pads (board coordinates)
  round 125 hole 125 unplated: 0(550,1600) 1(2600,1800) 2(600,3500) 3(2600,2900)

## Via types
v1: diameter 39.37, hole 19.68, Top Layer to Bottom Layer, tented both sides, 146 vias
v2: diameter 55.12, hole 27.56, Top Layer to Bottom Layer, tented both sides, 49 vias
v3: diameter 59.06, hole 59.06, Top Layer to Bottom Layer, 9 vias
v4: diameter 47.24, hole 27.56, Top Layer to Bottom Layer, tented both sides, 3 vias
v5: diameter 39.37, hole 19.68, Top Layer to Bottom Layer, 2 vias

## Nets (pads, with @x,y where several pads share a name; then routed paths per layer and width w, separated by ;. In a path a pad name is that pad's centre, name@x,y a point inside that pad or via, vN(x,y) a via of type N, cw(c..) or ccw(c..) an arc to the next point about the centre after c; other vN are vias at no path point)
AGND: C1.2 C2.2 C3.2 C4.2 C5.2 C6.2 C19.2 C22.2 C31.2 C41.1 C54.2 C63.2 J1.1 J2.1 J3.1 MIC1.2 NT1.2 U1.19 U1.20 U2.11 U3.4 U10.2 | length 5206
  Top Layer w12: v1(3170,1810) 3211.61,1851.61 U3.4@3211.61,1894.65
  Top Layer w16: U1.19@2893.86,2006.02 2952.8,2006.02 2978.39,2031.61 U1.20@2893.86,2031.61
  Top Layer w24: 2950,1660 2965,1675 v1(2995,1675) ; U2.11@3032.48,3099.72 3032.48,3052.52 v1(3045,3040) ; U10.2@3045,2322.76 3045,2270 v1(3050,2265) ; v1@3177.5,2382.5 3240,2445 3310,2445 3490,2625 3490,2930 v1(3340,3080)
  Top Layer w32: NT1.2@2870,1685 2925,1685 2950,1660 C41.1@2950,1615.43
  Bottom Layer w16: v1@2685,3300 2685,3299 2742,3242 ; v1(2815,2570) 2795,2590 2795,2992.63 2742,3045.63 2742,3242 ; C19.2@2858.9,3415 2858.9,3358.9 2742,3242 ; C6.2@3095.43,2350 3120.43,2375 3155,2375 3157.09,2377.09 C5.2@3157.09,2460
  Bottom Layer w24: C19.2@2858.9,3415 2858.9,3420.16 2893.74,3455 2955,3455 2993.69,3493.69 3132.42,3493.69 C31.2@3144.57,3481.54 3144.57,3481.17 3180,3445.74 3180,3300 C63.2@3107.5,3227.5 ; v1(2955,1860) 3007.34,1860 3041.31,1826.02 ; v1(2995,1675) 2995,1779.71 3041.31,1826.02 ; C1.2@3022.09,2025 3057.52,1989.57 C2.2@3110,1989.57 3125.37,1989.57 3265.43,2129.63 C4.2@3265.43,2130 3265.43,2226.65 C3.2@3252.09,2240 3252.09,2277.91 3155,2375 ; v1(3045,3040) 3035,3050 3035,3155 C63.2@3107.5,3227.5 ; v1(3050,2265) 3050,2304.2 3095.43,2349.63 C6.2@3095.43,2350 ; v1(3140,1955) 3140,1924.71 3041.31,1826.02 ; C54.2@3214.57,1810 v1(3170,1810) 3134.71,1810 3096.02,1771.31 3063.98,1771.31 3041.31,1793.98 3041.31,1826.02 ; v1(3340,3080) 3290,3130 3250,3130 3152.5,3227.5 C63.2@3107.5,3227.5
  other v1: 3155,1690 2980,2025 3175,2385 2680,3305
AVCC: C1.1 C2.1 C41.2 C54.1 L1.2 R3.1 R8.2 U1.23 U2.4 U3.8 U10.5 | length 5058.2
  Top Layer w16: U1.23@2893.86,2108.39 2938.14,2108.39 v1@2964.76,2135 ; v1@2970,2130 v1@2970,2135 ; U3.8@3288.39,1725.35 3288.39,1768.39 v1(3330,1810)
  Top Layer w24: v1(2960,2330) 2960,2369.65 U10.5@3007.6,2417.24 ; U2.4@3032.48,3288.7 3032.48,3237.52 3050,3220
  Top Layer w32: L1.2@2875.43,1545 C41.2@2949.57,1545 ; 3050,3220 3335,3220 3440,3115 v1(3720,3115)
  Bottom Layer w16: C54.1@3285.43,1810 v1(3330,1810) ; v1(3720,3115) 3720,3130 3739.37,3149.37 R8.2@3739.37,3190
  Bottom Layer w32: v1(2960,2330) 2945,2315 2945,2170 v1(2980,2135) ; v1@2969.57,2129.57 2895,2055 2895,1757.06 2920.56,1731.5 2920.56,1619.44 v1(2995,1545) ; v1@2985,2130 R3.1@3055.63,2130 3055.63,2114.8 C2.1@3110,2060.43 ; C54.1@3285.43,1810 3285.43,1680.43 3235,1630 3080,1630 v1(2995,1545) ; v1(3720,3115) 3720,2930 3700,2910 3700,1585 3660,1545 v1(2995,1545)
GND: C8.2 C9.2 C36.2 C37.1 C38.2 C39.1 C40.1 C42.2 C43.2 C44.1 C45.1 C46.1 C47.1 C48.1 C49.1 C50.1 C51.1 C52.1 C53.2 C55.1 C56.1 C57.1 C58.1 C59.2 C60.2 C61.2 C62.1 J4.4 J4.5 J4.6 J5.1 J5.2 J8.6 J8.10 J8.11 J8.12 J8.13 J12.5 J12.MH1 J12.MH2 J12.MH3 J12.MH4 LED1.K LED2.K LED3.K LED4.K LED5.K LED7.K NT1.1 P1.4 P3.4 P4.6 P4.7 P7.6 R40.1 R42.1 R60.3 R62.1 R63.1 R65.1 R67.2 S1.2 U1.14 U1.28 U4.1 U5.1 U6.12 U6.18 U6.63 U7.1 U7.2 U7.3 U7.4 U7.7 U8.8 U8.20 U8.23 U8.35 U8.47 U9.2 | length 19830
  Top Layer w12: J12.MH4@128.94,2659.57 J4.5@128.94,2762.99 128.94,2844.09 J4.4@235.63,2950.79 128.94,3057.48 J4.6@128.94,3237.01 128.94,3338.94 S1.2@170,3380 ; LED1.K@147.5,1545 266.26,1545 J5.2@346.26,1625 435,1625 585,1775 v2(705,1775) 751.85,1775 R60.3@926.85,1600 991.85,1535 1550,1535 1600,1585 P4.6@1600,1600 ; J12.MH3@259.8,2623.11 J12.MH4@92.48,2623.11 J12.MH1@92.48,2276.65 J12.MH2@259.8,2276.65 ; v2@465,2765 v2(480,2780) 480,2915 520,2955 v4(575,2955) ; U5.1@557.8,2620.55 557.8,2607.8 365.56,2415.56 358.2,2415.56 329.53,2386.89 J12.5@259.8,2386.89 J12.MH2@259.8,2276.65 ; v2(655,3185) 690,3150 690,3022.64 765.43,2947.21 765.43,2935 ; U9.2@685,2157.68 685,2115 ; C61.2@765.43,2800 C62.1@765.43,2880 765.43,2935 ; R62.1@840,2934.37 766.06,2934.37 765.43,2935 ; C39.1@855.43,2420 875,2400.43 v2(875,2345) ; v2(950,1900) 1010,1960 1060.3,1960 1061.3,1959 1176,1959 1402.5,1732.5 1777.5,1732.5 1900,1610 1900,1565 ; v2(990,2330) 890,2330 v2(875,2345) ; v2(1115,2510) 1115,2545 1079.44,2580.56 1079.44,2637.36 1122.5,2680.42 LED7.K@1122.5,2685 ; v2(1245,2010) 1249.57,2014.57 C46.1@1249.57,2065 ; v2@1405,3035 1430,3035 1465,3070 C60.2@1663.82,3070 ; v2(1580,2550) 1580,2575.43 C51.1@1645,2640.43 ; C51.1@1635.43,2640.43 C51.1@1645,2640.43 ; P4.7@1700,1600 1780,1520 1855,1520 1900,1565 ; U6.63@1759.53,2662.05 1712.05,2662.05 1690.43,2640.43 C51.1@1645,2640.43 ; U6.12@2048.9,2569.53 2048.9,2613.9 2097.05,2662.05 U6.18@2200.47,2662.05 2247.95,2662.05 2260,2650 2260,2605.87 2286.3,2579.57 C48.1@2305,2579.57 ; v2@2210,3020 v2(2210,3030) 2210,3060 2287.5,3137.5 ; C49.1@2300,3055.43 2300,3125 2287.5,3137.5 ; LED3.K@2380,3137.5 2287.5,3137.5 ; v2(2635,2730) 2635,2685 2680,2640 2680,2416.06 2661.97,2398.03 ; NT1.1@2810,1685 2690,1685 2580,1575 2580,1525 1940,1525 1900,1565 ; J12.MH2@259.8,2276.65 259.8,2230.2 335,2155 335,2100 395,2040 610,2040 685,2115 ; 685,2115 724.37,2075.63 R63.1@795,2075.63 840.63,2075.63 875,2110 v2(875,2345)
  Top Layer w16: U7.4@1798.54,1905 U7.3@1798.54,1955 U7.2@1798.54,2005 U7.1@1798.54,2055 ; LED3.K@2380,3137.5 LED4.K@2635,3137.5 ; v2(2460,1880) 2483.66,1903.66 U1.14@2626.14,1903.66 ; P7.6@2605.51,2398.03 2661.97,2398.03 2823.66,2236.34 U1.28@2893.86,2236.34
  Top Layer w24: U7.7@1991.46,2005 1993.02,2006.56 2141.56,2006.56 2165.43,2030.43 C55.1@2165.43,2060 ; C48.1@2305,2584.57 2305.43,2585 v2(2355,2585)
  Bottom Layer w12: v2(90,2535) 147.91,2477.09 C59.2@147.91,2450 ; J4.6@128.94,3237.01 J4.6@136.93,3245 ; J4.6@161.93,3270 J4.6@136.93,3245 ; v2(330,2155) 410,2155 560,2305 C36.2@682.91,2305 ; R67.2@425,2810.63 455.63,2780 v2(480,2780) ; R65.1@454.37,3185 454.37,3234.37 v2(470,3250) ; C56.1@460.43,2765 493.43,2732 540,2732 540.12,2732.12 559.56,2732.12 571.42,2743.97 U8.47@571.42,2780.55 ; U8.8@500.55,2969.53 560.47,2969.53 v4(575,2955) v4@580,2950 ; U8.20@689.53,3099.45 689.53,3174.92 C58.1@699.57,3185 747.8,3136.81 747.8,3100.23 U8.23@748.58,3099.45 ; C58.1@699.57,3185 v2(655,3185) 590,3250 v2(470,3250) ; v2(705,1775) 825,1775 v2(950,1900) ; U4.1@726.14,2620.55 789.45,2620.55 890,2520 ; U8.35@819.45,2851.42 863.58,2851.42 890.43,2824.57 C57.1@890.43,2785 ; v2(875,2345) 875,2384.57 C37.1@840,2419.57 890,2469.57 890,2520 ; C57.1@900,2785 C57.1@890.43,2785 ; P3.4@1040,3500 1040,3360 1375,3025 1395,3025 v2@1405,3035 ; v2(1115,2510) 1049.99,2510 J8.13@1039,2499.01 990,2450.01 v2(990,2330) 990,2174 J8.12@1039,2125 1039,2046 1075,2010 v2(1245,2010) ; J8.6@1241.93,2081 1245,2077.93 v2(1245,2010) ; 1644.8,2230 J8.11@1644.8,2125 ; 1649.8,2235 1695,2235 ; J8.10@1690,2499.01 1695,2494.01 1695,2235 ; v2(1695,2040) 1644.8,2090.2 J8.11@1644.8,2125 ; C47.1@1860,2519.57 1860,2490 1835,2465 1835,2304.57 ; C50.1@1890.43,3085 1965,3085 2020.63,3029.37 R40.1@2155,3029.37 ; C43.2@1985,2305.43 1895.87,2305.43 C45.1@1895,2304.57 1835,2304.57 ; C52.1@1997,2407.57 1997,2353 v2(2000,2350) ; v2(2320,3090) 2465,2945 2465,2900 v2(2635,2730) ; J4.6@136.93,3245 460,3245 465,3250 v2(470,3250) ; 890,2520 890,2714.13 890.43,2714.57 C57.1@890.43,2785 ; v2(1245,2010) 1305,1950 1345,1950 1405,2010 1529.8,2010 J8.11@1644.8,2125 ; 1695,2235 C42.2@1749.57,2235 1749.57,2264.57 1775,2290 C44.1@1775,2304.57 1835,2304.57
  Bottom Layer w16: S1.2@170,3380 259.37,3380 R42.1@295,3415.63 325.63,3415.63 365,3455 535,3455 535.2,3455.2 567.9,3422.5 632.1,3422.5 677.5,3467.9 677.5,3542.5 715,3580 960,3580 P3.4@1040,3500 ; v2(1580,2550) 1639.01,2550 J8.10@1690,2499.01 ; 2192.38,2922.11 2235,2964.73 C53.2@2235,2986.18
  Bottom Layer w24: R40.1@2155,3029.37 2209.37,3029.37 v2(2210,3030) ; 2192.38,2922.11 2185,2914.73 2185,2745 2345,2585 v2(2355,2585)
  other v1: 1235,2225 1335,2225
  other v2: 2785,1855 1685,1885 2200,1885 2550,1885 255,2040 2260,2055 2140,2140 1930,2170 90,2360 2180,2360 1420,3025 2675,3145 2580,3280
  other v4: 320,2765
NetC3_1: C3.1 C4.1 R3.2 U1.22 | length 491.8
  Top Layer w16: U1.22@2893.86,2082.8 2945.08,2082.8 2952.84,2090.56 2975,2090.56 2976.88,2092.44 2997.63,2092.44 3020,2114.81 v1(3020,2175) v1@3020,2180
  Bottom Layer w24: v1(3020,2175) 3035,2190 3105,2190 ; C3.1@3137.91,2240 3137.91,2222.91 3105,2190 ; C4.1@3194.57,2130 R3.2@3134.37,2130 3134.37,2160.63 3105,2190
NetC5_1: C5.1 C6.1 U1.21 U10.1 | length 606.5
  Top Layer w16: U1.21@2893.86,2057.2 2952.02,2057.2 2962.37,2067.56 3005.27,2067.56 3065,2127.29 3065,2185 v1(3010,2240) v1@3010,2245
  Top Layer w24: v1@3007.6,2245 U10.1@3007.6,2322.76
  Bottom Layer w24: v1@3010,2255 3010,2335.43 C6.1@3024.57,2350 ; C6.1@3020,2350 C5.1@3020,2437.09
NetC7_1: C7.1 R4.2 R6.2 | length 142.1
  Top Layer w16: R6.2@3221.69,2610 R4.2@3221.69,2680 ; C7.1@3224.57,2535 R6.2@3224.57,2607.13
NetC7_2: C7.2 U1.18 | length 856.9
  Top Layer w16: U1.18@2893.86,1980.43 2995.62,1980.43 3032,2016.81 3032,2059.58 3080,2107.58 3080,2109.76 3088,2117.76 3088,2263 3117.44,2292.44 3117.44,2360.98 3117.31,2361.11 3117.31,2472.46 3129.86,2485 3260,2485 3295.43,2520.43 C7.2@3295.43,2535
NetC10_1: C10.1 R4.1 R5.2 R7.2 | length 210.6
  Top Layer w16: R7.2@3231.06,2821.26 R5.2@3306.06,2821.26 ; R4.1@3300.43,2680 R5.2@3300.43,2815.63
NetC11_1: C11.1 R7.1 U2.13 | length 240.6
  Top Layer w16: U2.13@3132.48,3099.72 3132.48,3067.52 3231.06,2968.94 R7.1@3231.06,2900
NetC11_2: C11.2 C17.1 C33.1 R5.1 U2.14 | length 1107.2
  Top Layer w16: U2.14@3182.48,3099.72 3182.48,3079.65 C11.2@3301.5,2960.63 C11.2@3306.06,2956.06 ; C17.1@3265.43,2205 3265.43,2225.43 3340,2300 v1@3340,2395 ; R5.1@3306.06,2900 C11.2@3306.06,2956.06 ; v1(3350,2955) 3307.13,2955 C11.2@3306.06,2956.06
  Bottom Layer w16: v1(3350,2955) 3385,2920 3385,2560 3352.91,2527.91 C33.1@3352.91,2460
  Bottom Layer w24: v1(3345,2395) 3345,2452.09 C33.1@3352.91,2460
NetC12_1: C12.1 J1.2 | length 101.7
  Bottom Layer w16: C12.1@3485,3009.57 J1.2@3586.73,3009.57
NetC12_2: C12.2 R11.1 R16.1 | length 1019.1
  Bottom Layer w16: R16.1@2867.2,3494.37 R11.1@2923.46,3494.37 2989.09,3560 3305,3560 3485,3380 C12.2@3485,3080.43
NetC13_1: C13.1 R34.1 U3.7 | length 325.2
  Top Layer w16: U3.7@3262.8,1725.35 3262.8,1656.57 ; R34.1@3299.37,1620 3262.8,1656.57 ; v1(3350,1740) 3350,1720 3286.57,1656.57 3262.8,1656.57
  Bottom Layer w24: v1(3350,1740) 3350,1672.91 C13.1@3352.91,1670
NetC13_2: C13.2 J2.3 J2.5 | length 224.7
  Bottom Layer w32: C13.2@3467.09,1670 3472.52,1664.57 3587.24,1664.57 ; J2.5@3587.24,1713.78 3587.24,1664.57 ; J2.3@3590,1618.11 J2.3@3587.24,1615.35 3587.24,1664.57
NetC14_1: C14.1 R12.2 R14.2 | length 129.1
  Top Layer w16: C14.1@3170.43,2530.87 R14.2@3170.43,2590 R12.2@3170.43,2660
NetC14_2: C14.2 U1.17 | length 668.7
  Top Layer w16: U1.17@2893.86,1954.84 3002.56,1954.84 3055,2007.29 3055,2050.05 3105,2100.05 3105,2102.23 3111,2108.23 3111,2252.06 3140.44,2281.5 3140.44,2370.51 3140.31,2370.63 3140.31,2399.37 3160,2419.05 C14.2@3160,2449.57
NetC15_1: C15.1 R10.1 R12.1 R13.2 R15.1 | length 284.3
  Top Layer w16: R12.1@3091.26,2660.43 R15.1@3091.26,2810 R13.2@3091.26,2885
  Bottom Layer w16: v1(3075,2845) 3085,2855 R10.1@3085,2900.63
NetC16_1: C16.1 R13.1 U2.12 | length 245.4
  Top Layer w16: U2.12@3082.48,3099.72 3082.48,3052.52 3166.06,2968.94 C16.1@3166.06,2960 ; R13.1@3170,2885 C16.1@3170,2956.06
NetC17_2: C17.2 R18.2 | length 128.7
  Top Layer w12: R18.2@3185.2,2074.57 R18.2@3190.63,2080
  Top Layer w16: R18.2@3190.63,2080 C17.2@3190.63,2201.06
NetC18_1: C18.1 R9.1 U3.1 | length 269.5
  Top Layer w16: v1(3350,1890) 3293.03,1890 U3.1@3288.39,1894.65 3288.39,1929.02 R9.1@3359.37,2000
  Bottom Layer w32: v1(3350,1890) 3350,1957.09 C18.1@3352.91,1960
NetC18_2: C18.2 J2.2 J2.4 | length 218.6
  Bottom Layer w32: C18.2@3467.09,1960 3587.24,1960 ; J2.4@3587.24,1910.63 3587.24,1960 ; J2.2@3587.24,2009.06 3587.24,1960
NetC19_1: C19.1 R16.2 R17.2 R19.2 | length 134.2
  Top Layer w12: R17.2@2790,3459.37 R17.2@2790.16,3459.21
  Top Layer w16: R17.2@2790.16,3459.21 R19.2@2853.11,3459.21
  Bottom Layer w16: C19.1@2788.03,3415 R16.2@2788.03,3486.06
  other v1: 2750,3485
NetC20_1: C20.1 C26.2 R17.1 U2.7 | length 217.2
  Top Layer w16: C26.2@2775,3320.43 2775,3345 2790,3360 R17.1@2790,3380.63 C20.1@2853.46,3380.63 ; C20.1@2857.05,3365.51 2882.48,3340.08 U2.7@2882.48,3288.7
NetC20_2: C20.2 R19.1 U2.6 | length 174
  Top Layer w16: R19.1@2931.85,3459.21 2931.85,3388.15 C20.2@2927.91,3384.21 2932.48,3379.65 U2.6@2932.48,3288.7
NetC21_1: C21.1 R20.2 R22.2 | length 190.3
  Top Layer w16: R20.2@2827.91,2715 R22.2@2827.91,2645 2827.91,2637.09 2890,2575 C21.1@2890,2550.43
NetC21_2: C21.2 U1.16 | length 1364.7
  Top Layer w16: C21.2@2890,2479.57 2890,2425 v1(2925,2390) ; U1.16@2893.86,1929.25 3009.49,1929.25 3080,1999.76 3080,2042.53 3130,2092.53 3130,2094.7 3134,2098.7 3134,2242.53 3162.02,2270.56 3163.09,2270.56 3163.44,2270.91 3163.44,2298.44 3255,2390 v1(3255,2400)
  Bottom Layer w16: v1@2920,2395 2920,2475 3003,2558 3194.53,2558 3255,2497.53 v1(3255,2400)
NetC22_1: C22.1 U3.3 | length 114.4
  Top Layer w16: C22.1@3215.43,2000 3237.2,1978.23 U3.3@3237.2,1894.65
NetC23_1: C23.1 R20.1 R21.2 R23.2 | length 220.6
  Top Layer w16: R20.1@2749.17,2715 2749.17,2787.64 C23.1@2751.54,2790 2741.97,2799.57 R21.2@2741.97,2855.63 R23.2@2816.97,2855.63
NetC24_1: C24.1 R23.1 U2.9 | length 205.2
  Top Layer w16: R23.1@2816.97,2934.37 2823.98,2941.38 C24.1@2823.98,3000 2833.98,3010 2833.98,3013.98 2883.98,3013.98 U2.9@2932.48,3062.48
NetC24_2: C24.2 C27.2 C35.1 R21.1 U2.8 | length 2212.5
  Top Layer w12: C27.2@3090,1765.43 v1@3090,1810
  Top Layer w16: R21.1@2753.11,2945.51 C24.2@2753.11,3000 2798.11,3045 2860,3045 U2.8@2882.48,3067.48 ; U2.8@2882.48,3099.72 2882.48,3147.48 2895,3160 3205,3160 3245,3120 v1(3245,3090)
  Bottom Layer w16: v1(3080,1810) 3095,1810 3245,1960 3245,2005 3352.91,2112.91 C35.1@3352.91,2170 3352.91,2302.09 3297.56,2357.44 3297.56,2517.56 3355,2575 3355,2890 3245,3000 v1(3245,3090)
NetC25_1: C25.1 J1.3 J1.5 | length 204.9
  Bottom Layer w16: C25.1@3480,2714.57 J1.5@3586.46,2714.57
  Bottom Layer w32: J1.3@3587.24,2615.35 J1.5@3587.24,2713.78
NetC25_2: C25.2 R26.1 R30.1 | length 833.2
  Bottom Layer w16: R26.1@3219.37,3406.54 R30.1@3284.37,3406.54 ; R30.1@3285,3407.17 3287.83,3410 3355,3410 3440,3325 3440,3270 3415,3245 3415,2980 3480,2915 C25.2@3480,2785.43
NetC26_1: C26.1 U1.25 | length 1253.3
  Top Layer w16: C26.1@2775,3249.57 2815,3209.57 v1(2815,3175) ; U1.25@2893.86,2159.57 2939.57,2159.57 2960,2180 2960,2197.47 2972.21,2209.69 2972.21,2260.31 2900,2332.53 v1(2900,2335)
  Bottom Layer w16: v1(2815,3175) 2788,3148 2788,3064.69 2843.19,3009.5 2843.19,2634.53 2882.44,2595.27 2882.44,2352.56 v1(2900,2335)
NetC27_1: C27.1 R24.2 | length 78.4
  Top Layer w12: C27.1@3080.63,1685.2 C27.1@3090,1694.57
  Top Layer w16: R24.2@3080.63,1620 C27.1@3080.63,1685.2
NetC28_1: C28.1 R28.2 R31.2 | length 262.1
  Top Layer w16: R28.2@2879.17,2665 2879.17,2625.83 2919.88,2585.12 2920.89,2585.12 2932.56,2573.45 2932.56,2572.44 2954.57,2550.43 C28.1@2965,2550.43
  Bottom Layer w16: R31.2@2887.6,2647.4 2955,2580 v1(2955,2570)
NetC28_2: C28.2 U1.15 | length 1206
  Top Layer w16: U1.15@2893.86,1903.66 3018.66,1903.66 3105,1990 3105,2035 3155,2085 3155,2087.18 3157,2089.18 3157,2233.01 3171.55,2247.56 3172.61,2247.56 3255,2329.95 v1(3255,2335) ; v1(2965,2440) C28.2@2965,2479.57
  Bottom Layer w16: v1(2965,2440) 2965,2480 3020,2535 3185,2535 3210,2510 3210,2380 v1(3255,2335)